# EAGLE board Micro RC Transmitter (EAGLE 9.1.0)
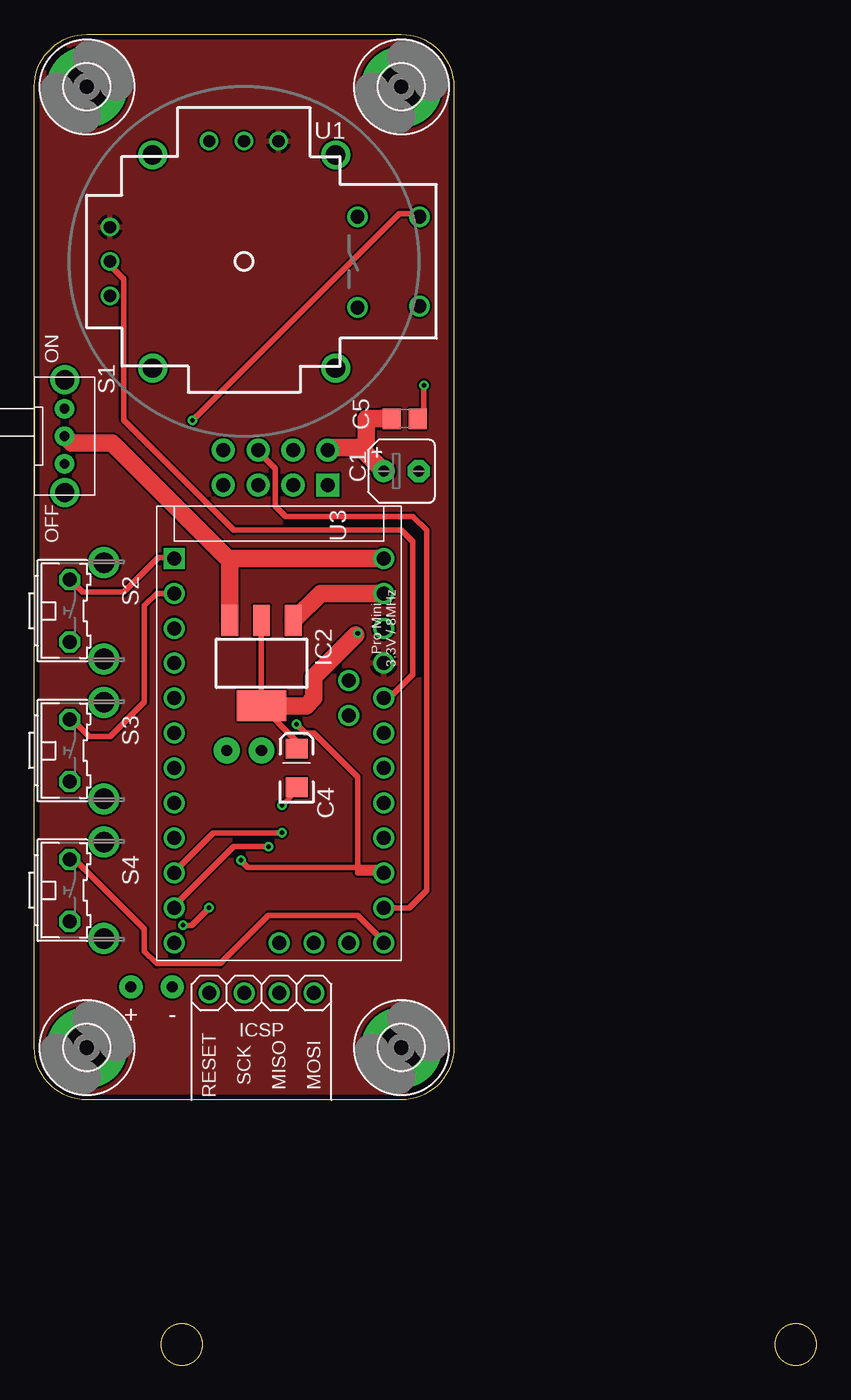
[diagram p0: board, top side]
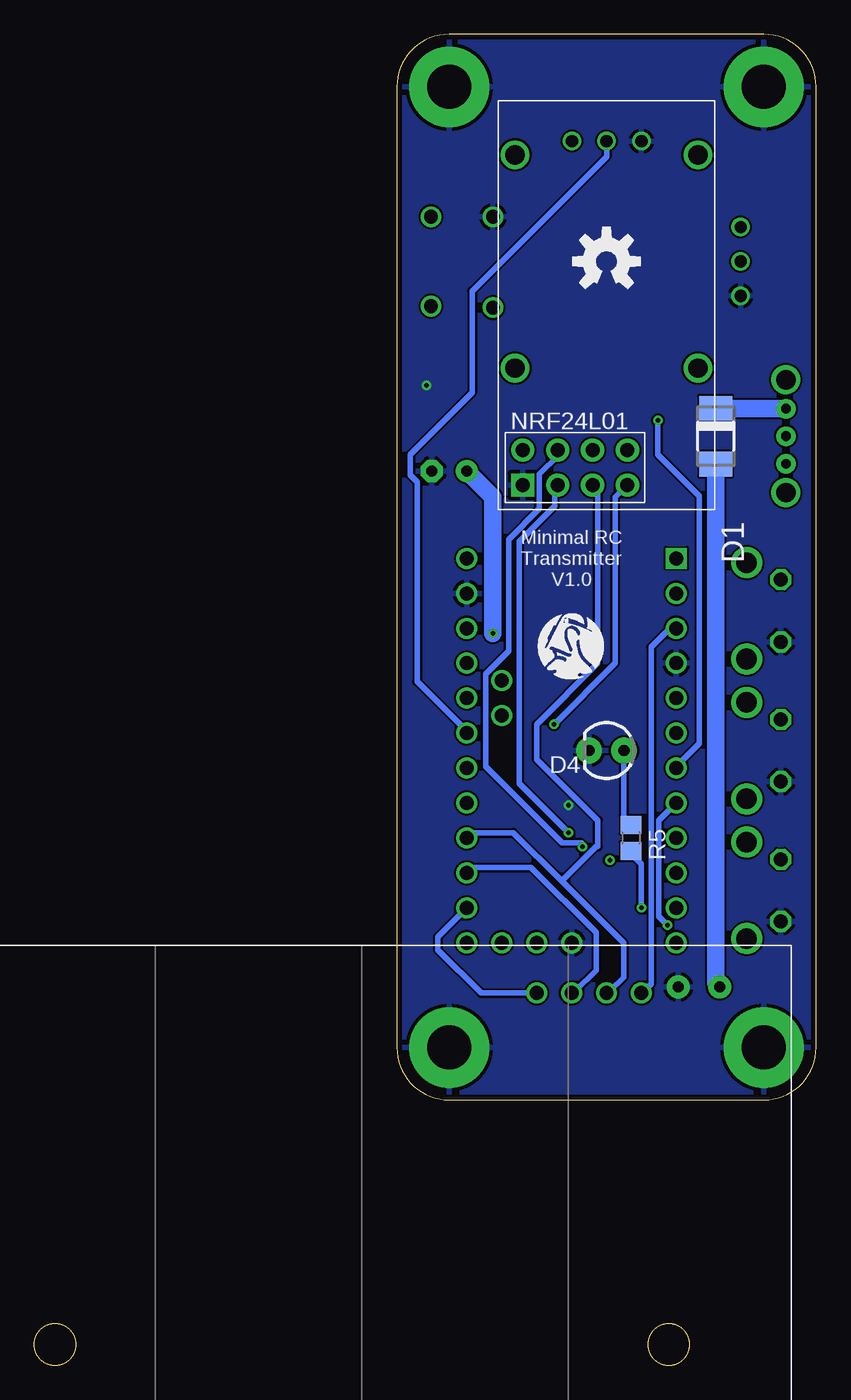
[diagram p1: board, bottom side, seen from below]

Size 30.48 x 77.47 mm. Coordinates in mm from the lower left corner, seen from the top.
Outline: 0,3.81 0,73.66 arc-90 3.81,77.47 26.67,77.47 arc-90 30.48,73.66 30.48,3.81 arc-90 26.67,0 3.81,0 arc-90 0,3.81
Copper layers (1*16): Top 0.0356mm / dielectric 1.5011mm / Bottom 0.0356mm
Design rules "OSHPark_LaenPCBOrder *": minimum track width 16mil, minimum drill 13mil, track to track 6mil, track to pad 6mil, pad to pad 6mil, via to via 6mil, smd to smd 6mil, copper to edge 15mil, drill to drill 6mil, minimum pad ring 7mil, minimum via ring 7mil, stop-mask expansion 3mil, vias tented up to drill 0mil, thermal gap 10mil

## Footprints (pad centres in the part's own frame; a part is rotated, then mirrored left to right if it is on the bottom)
B45181A = drill 0.813 pad 1.6: + -1.27,0 | drill 0.813 pad 1.6 octagon: - 1.27,0
EIA3216 = smd 1.4 x 1.6: A 1.4,0; C -1.4,0
C0805 = smd 1.3 x 1.5: 1 -0.95,0; 2 0.95,0
DO-214AC = smd 1.8 x 2.4: A 2.025,0; C -2.025,0
LED3MM = drill 0.813 pad 1.88: A -1.27,0; K 1.27,0
4X_AA_BATTERY_HOLDER = drill 0.8 pad 1.676: 1 26,26; 2 23,26
3,2-PAD = drill 3.2 pad 5.842: B3,2 0,0
NRF24L01 = drill 1.016 pad 1.676 square: 1 -1.27,1.27 | drill 1.016 pad 1.676: 2 -3.81,1.27; 3 -1.27,3.81; 4 -3.81,3.81; 5 -1.27,6.35; 6 -3.81,6.35; 7 -1.27,8.89; 8 -3.81,8.89
SOT223 = smd 1.219 x 2.235: 1 -2.311,-3.099; 2 0,-3.099; 3 2.311,-3.099 | smd 3.6 x 2.2: TAB 0,3.099
1X04 = drill 1.016: 1 -3.81,0; 2 -1.27,0; 3 1.27,0; 4 3.81,0
R0805 = smd 1.3 x 1.5: 1 -0.95,0; 2 0.95,0
OS102011MA1QN1 = drill 0.7 pad 1.422: 1 -2,0; 2 0,0; 3 2,0 | drill 1.4 pad 2.032: MT1 -4.1,0; MT2 4.1,0
B3F-31XX = drill 1.016 octagon: 1 -2.261,-1.245; 2 2.261,-1.245 | drill 1.499 pad 2.159: 3 -3.505,1.245; 4 3.505,1.245
JOYSTICK = drill 1: B1A -3.25,12.75; B1B 3.25,12.75; B2A -3.25,8.25; B2B 3.35,8.25 | drill 0.889: H1 -2.5,-9.75; H2 0,-9.75; H3 2.5,-9.75; V1 -8.75,2.5; V2 -8.75,0; V3 -8.75,-2.54 | drill 1.397: MOUNT1 -7.75,6.65; MOUNT2 -7.75,-6.65; MOUNT3 7.75,-6.65; MOUNT4 7.75,6.65
ARDUINO_PRO_MINI = drill 1.016 square: 1 -7.62,12.7 | drill 1.016: 2 -7.62,10.16; 3 -7.62,7.62; 4 -7.62,5.08; 5 -7.62,2.54; 6 -7.62,0; 7 -7.62,-2.54; 8 -7.62,-5.08; 9 -7.62,-7.62; 10 -7.62,-10.16; 11 -7.62,-12.7; 12 -7.62,-15.24; 13 7.62,-15.24; 14 7.62,-12.7; 15 7.62,-10.16; 16 7.62,-7.62; 17 7.62,-5.08; 18 7.62,-2.54; 19 7.62,0; 20 7.62,2.54; 21 7.62,5.08; 22 7.62,7.62; 23 7.62,10.16; 24 7.62,12.7; 25 5.08,1.27; 26 5.08,3.81; 27 0,-15.24; 28 2.54,-15.24; 29 5.08,-15.24

## Placement (x,y rotation side)
C1  3.3uF  [B45181A]  26.67,45.72 0 top
C4  10uF  [EIA3216]  19.05,24.13 90 top
C5  100nF  [C0805]  26.91,49.53 0 top
D1  1N4004  [DO-214AC]  7.3,48.26 270 bottom
D4  [LED3MM]  15.24,25.4 180 bottom
G1  4X_AA_BATTERY_HOLDER  [4X_AA_BATTERY_HOLDER]  33.02,-17.78 0 bottom
H1  MOUNT-PAD-ROUND3.2  [3,2-PAD]  3.81,73.66 0 top
H2  MOUNT-PAD-ROUND3.2  [3,2-PAD]  3.81,3.81 0 top
H3  MOUNT-PAD-ROUND3.2  [3,2-PAD]  26.67,73.66 0 top
H4  MOUNT-PAD-ROUND3.2  [3,2-PAD]  26.67,3.81 0 top
IC1  NRF24L01+  [NRF24L01]  22.61,43.43 270 bottom
IC2  1117-3.3  [SOT223]  16.51,31.75 180 top
JP1  [1X04]  16.51,7.78 180 top
LOGO1  OSHW-LOGOM  [OSHW-LOGO-M]  15.24,60.96 0 bottom
LOGO2  OSHW-LOGOM  [R2BUILDERS-LOGO]  20.32,30.48 0 bottom
R5  150R  [R0805]  13.46,19.05 270 bottom
S1  OS102011MA1QN1  [OS102011MA1QN1]  2.2,48.26 270 top
S2  [B3F-31XX]  3.81,35.56 270 top
S3  [B3F-31XX]  3.81,25.4 270 top
S4  [B3F-31XX]  3.81,15.24 270 top
U1  JOYSTICKPTH  [JOYSTICK]  15.24,60.96 270 top
U3  ARDUINO_PRO_MINI  [ARDUINO_PRO_MINI]  17.78,26.67 0 top

## Library data of the parts
C1 C5 = rcl
C4 = SparkFun-Capacitors; PROD_ID: CAP-00811
D1 = diode
D4 = SparkFun-LED; PROD_ID: DIO-08794
G1 IC1 U3 = 00_custom
H1-H4 = holes
IC2 = lm1117
JP1 = 00_custom_pinhead
LOGO1 = SparkFun-Aesthetics
LOGO2 = rseries
R5 = rcl; SPICEPREFIX: R
S1 U1 = Sloan_Library
S2-S4 = switch-omron; MPN: B3F-3100; OC_FARNELL: 959704; OC_NEWARK: 36M3582

## Nets
0: S3.1 U3.2
1: S2.1 U3.1
4: U1.B1A U3.7
5: R5.2 U3.8
7: IC1.3 U3.10
8: IC1.4 U3.11
10: S4.1 U3.13
+3V3: U1.H1 U1.V1 U3.21
A2: U1.V2 U3.19
A3: U1.H2 U3.20
GND: C1.- C4.C C5.2 D4.K G1.2 H1.B3,2 H2.B3,2 H3.B3,2 H4.B3,2 IC1.1 IC2.1 S2.2 S3.2 S4.2 U1.B2A U1.H3 U1.V3 U3.4 U3.23 U3.27
MISO: IC1.7 JP1.2 U3.15
MOSI: IC1.6 JP1.1 U3.14
N$1: D4.A R5.1
N$7: D1.A G1.1
N$8: D1.C S1.1
N$9: C1.+ C4.A C5.1 IC1.2 IC2.2 IC2.TAB
RAW: IC2.3 S1.2 U3.24
RESET: JP1.4 U3.3
SCK: IC1.5 JP1.3 U3.16

## Tracks (layer width: path | path; a pad name or v marks a point on that pad's centre or on a via)
0
  Top 0.406: S3.1 3,27.42 4,26.42 5.5,26.42 8,28.92 8,35.94 8.89,36.83 U3.2
1
  Top 0.406: S2.1 3,37.42 3.5,36.92 6.5,36.92 9,39.42 10,39.42 U3.1
4  (via drill 0.33)
  Top 0.406: v11.5,49.42 26.5,64.42 27.5,64.42 U1.B1A
  Bottom 0.406: v11.5,49.42 11.5,46.92 8.5,43.92 8.5,25.92 10,24.42 U3.7
5  (via drill 0.33)
  Top 0.406: v12.7,13.97 11.43,12.7 v10.79,12.7
  Bottom 0.406: v12.7,13.97 12.7,17.15 13.34,17.78 R5.2 | v10.79,12.7 11.43,13.33 11.43,20.32 U3.8
7  (via drill 0.33)
  Top 0.406: v18,19.42 13,19.42 10.5,16.92 U3.10
  Bottom 0.406: IC1.3 19,44.42 19,43.18 21.54,40.64 21.59,40.64 21.59,23.01 v18,19.42
8  (via drill 0.33)
  Top 0.406: v17,18.42 14.5,18.42 10.5,14.42 U3.11
  Bottom 0.406: IC1.4 18.72,46.89 20.12,45.49 20.12,42.98 22.35,40.74 22.35,32.64 24.03,30.96 24.03,24.26 18.44,18.67 17.04,18.67 v17,18.42
10
  Top 0.406: S4.1 3,17.42 8,12.42 8,10.81 8.89,9.92 13.5,9.92 17,13.42 23.5,13.42 25,11.92 U3.13
+3V3
  pour Top: -2.54,-3.81 -2.54,80.01 35.56,80.01 35.56,-3.81
A2
  Bottom 0.406: U3.19 25.5,26.92 29,30.42 29,44.92 29.5,45.42 29.5,46.92 25,51.42 25,58.82 15.24,68.58 U1.V2
A3
  Top 0.406: U3.20 25.79,29.21 27.5,30.92 27.5,40.64 27.45,40.64 26.67,41.42 14.5,41.42 6.5,49.42 6.5,59.69 5.23,60.96 U1.H2
GND  (via drill 0.33)
  Top 0.406: v28.31,51.96 28.31,49.98 C5.2 | C4.C 19.03,22.45 v18,21.42
  Top 1.27: U3.23 20.8,36.83 IC2.1
  pour Bottom: -1.27,-3.81 -1.27,78.74 34.29,78.74 34.29,-3.81
MISO  (via drill 0.33)
  Top 0.406: v15,17.42 15.5,16.92 25,16.92 U3.15 23.5,16.51 23.5,23.49 20.32,26.67 19.68,26.67 v19.05,27.3
  Bottom 0.406: JP1.2 17.5,7.92 16,9.42 16,12.19 20.73,16.92 25,16.92 U3.15 | IC1.7 14,44.42 14.61,43.82 14.61,31.75 v19.05,27.3
MOSI
  Top 0.406: IC1.6 16.5,46.92 17.5,45.92 17.5,43.18 18.26,42.42 27.5,42.42 28.5,41.42 28.5,15.24 27.23,13.97 U3.14
  Bottom 0.406: U3.14 27.5,11.87 27.5,10.92 24.36,7.78 JP1.1
N$1
  Bottom 0.406: D4.A 13.97,20.32 R5.1
N$7
  Bottom 1.27: G1.1 7.3,8.5 7.3,28.22 D1.A
N$8
  Bottom 1.27: S1.1 7.28,50.26 D1.C
N$9  (via drill 0.33)
  Top 0.406: 21.5,47.42 IC1.2 | C4.A 19.01,26.15 IC2.TAB 16.5,28.92 16.5,34.42 IC2.2 | 23.36,33.79 v23.5,33.92
  Top 1.27: IC2.TAB 19.76,28.65 20.32,29.21 20.32,30.74 23.36,33.79 | C1.+ 23.7,47.42 | 23.7,47.42 21.5,47.42 | 23.7,47.42 24.13,47.85 24.13,49.53 C5.1
  Bottom 1.27: 23.5,43.82 23.5,41.91 | 23.5,41.91 v23.5,33.92 | C1.+ 23.5,43.82 | 23.5,43.82 23.5,41.91
RAW
  Top 0.406: 14.5,38.92 14.5,34.92 IC2.3 | 14.5,38.92 25,38.92 U3.24 | 14.01,39.41 14.5,38.92
  Top 1.27: S1.2 2.7,47.76 5.66,47.76 14.01,39.41 | 14.01,39.41 14.05,39.37 U3.24 | IC2.3 14.2,39.22 14.01,39.41
RESET
  Bottom 0.406: JP1.4 12.5,7.92 12,8.42 12,32.92 10.5,34.42 U3.3
SCK
  Bottom 0.406: 18.5,15.92 22,19.42 25,19.42 U3.16 | 18.5,15.92 14,11.42 14,8.92 15,7.92 JP1.3 | 18.5,15.92 16,18.42 15.88,18.41 15.88,20.32 20.32,24.77 20.32,27.3 15.88,31.75 15.88,43.18 15.88,44.32 IC1.5

## Text on the board
tNames: ON | OFF | Pro Mini / 3.3V / 8MHz | ICSP | RESET | SCK | MISO | MOSI
bNames: NRF24L01 | Minimal RC / Transmitter / V1.0